# Altium PCB 主控.pcbdoc
Units mil, origin at the board's own origin, x right, y up, seen from the top; angles counter-clockwise.
Board outline 1526.77 x 1936.38 mil, 2 copper layers (Top Layer, Bottom Layer); 18 components, 30 nets, 117 pads, 45 vias.
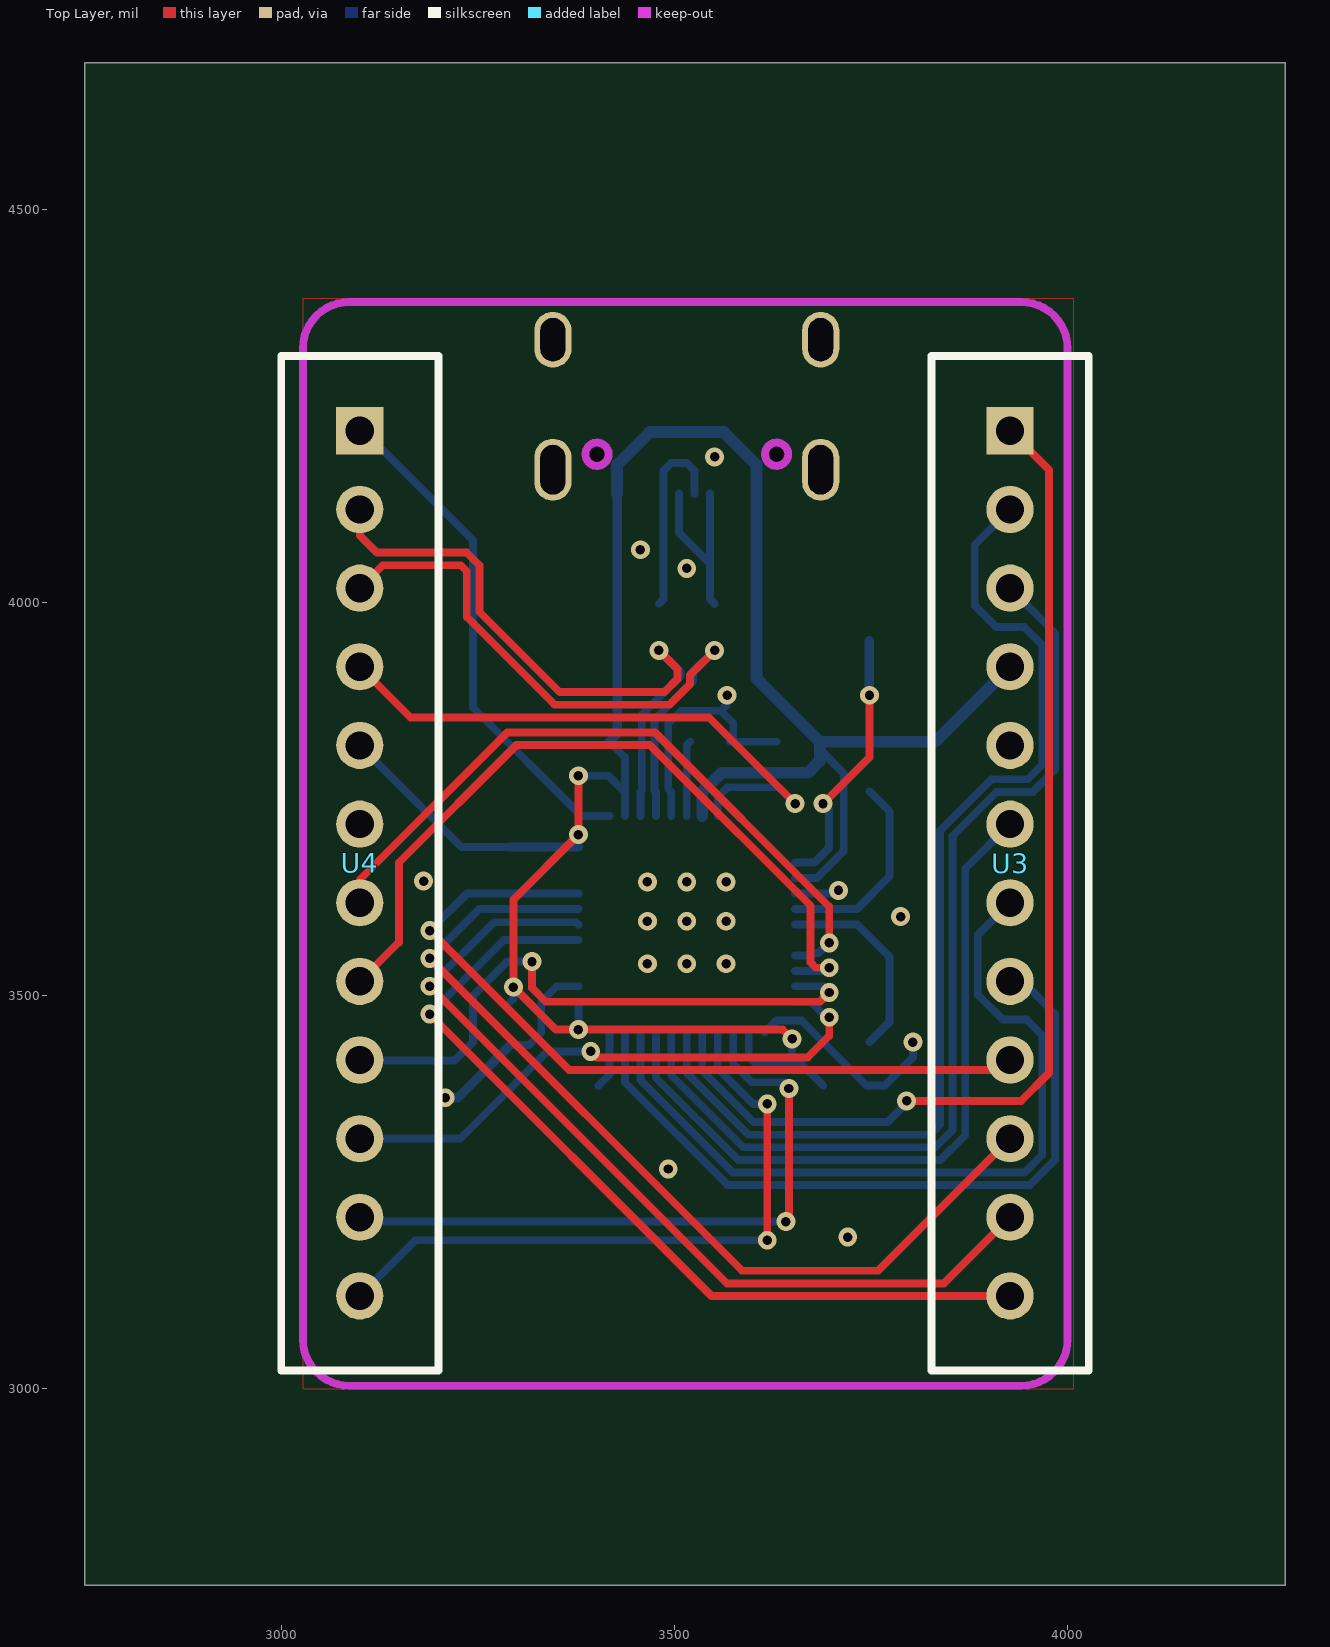
[diagram p0: Top Layer view]
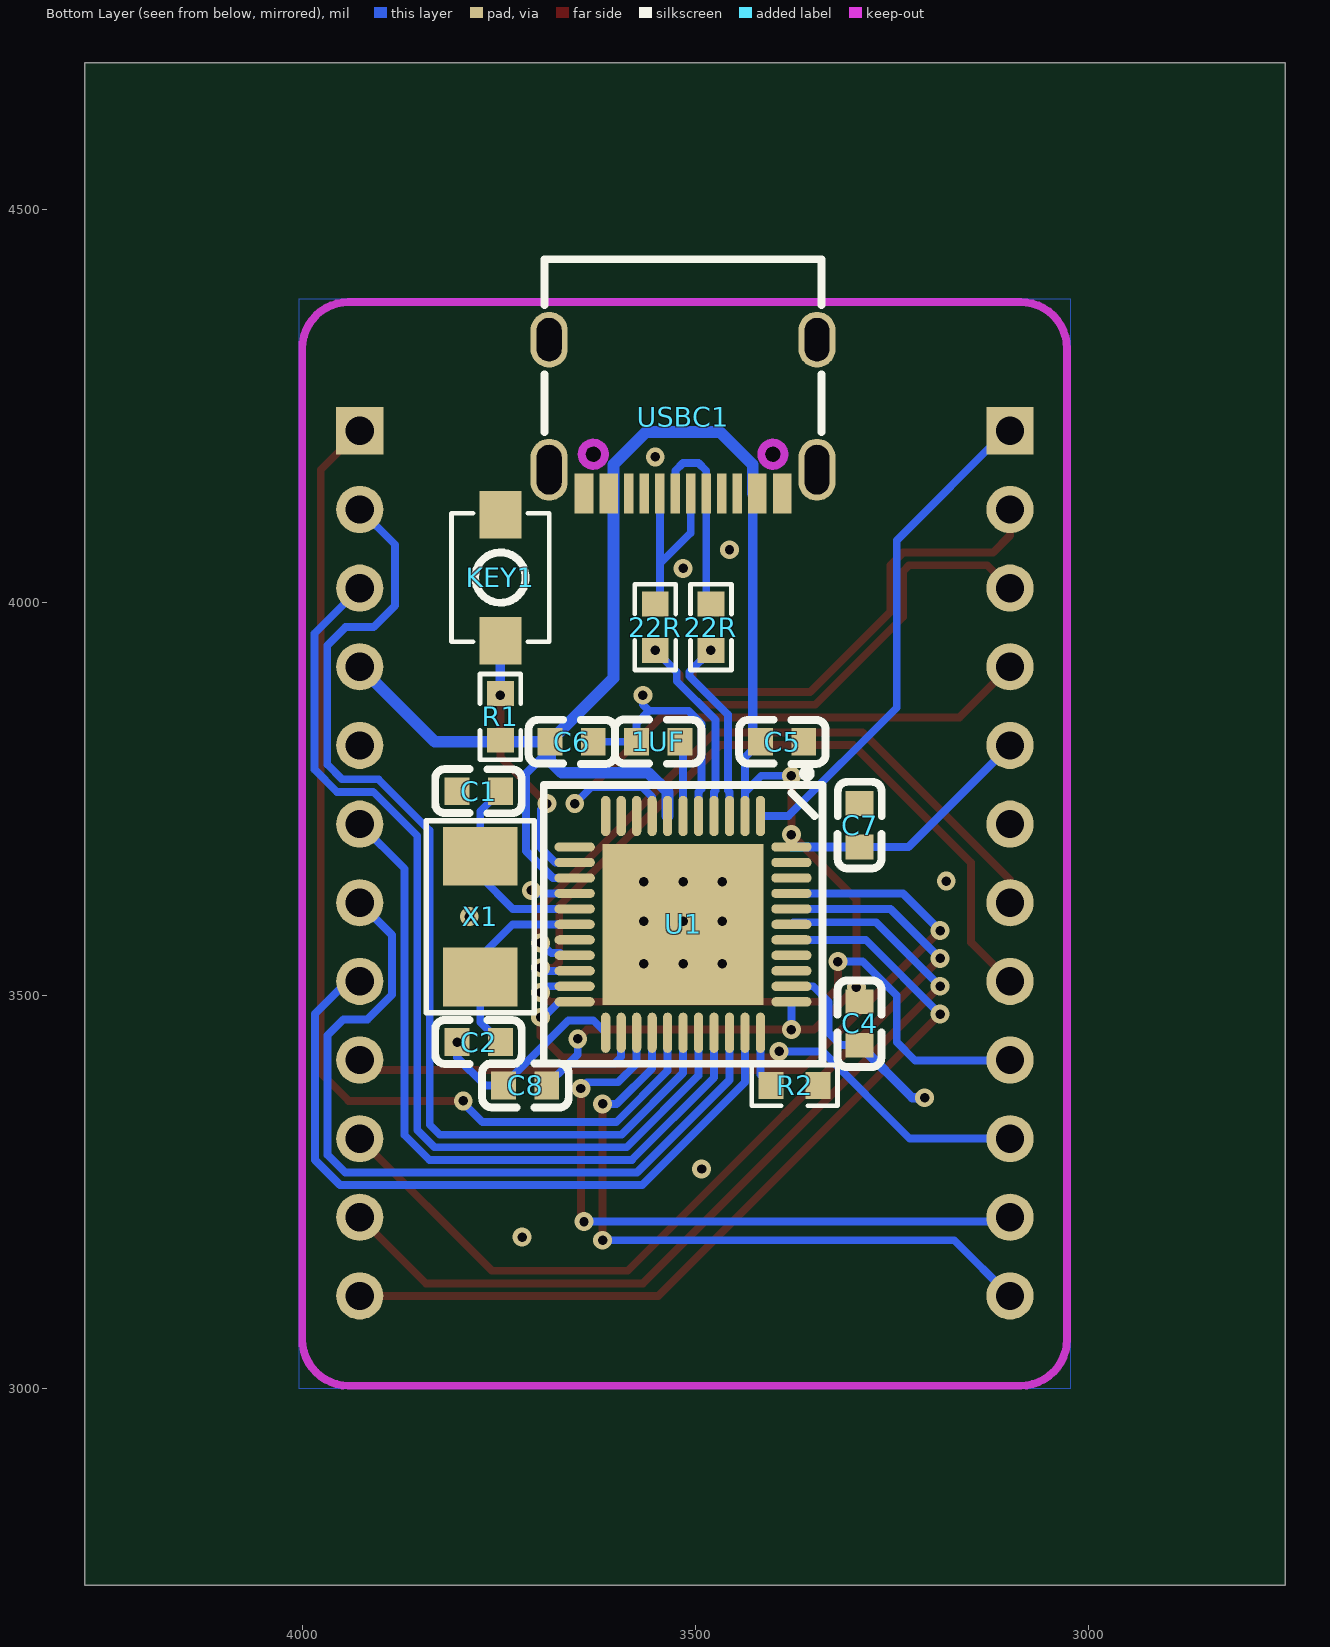
[diagram p1: Bottom Layer view, seen from below]

## Layer stack, top to bottom
Top Layer: signal copper (thickness not stored)
Dielectric: dielectric 12.6, FR-4, Dk 4.8
Bottom Layer: signal copper (thickness not stored)

## Board outline
4276.77,2750 2750,2750 2750,4686.38 4276.77,4686.38

## Components (designator, comment, footprint, x,y, rotation, side; value= is the part's Value field where it differs from the comment)
1UF "1uF" C0603 3547.24,3822.83 r180 bottom
22R "22Ω" R0603 3480.31,3968.5 r270 bottom
22R "22Ω" R0603 3551.18,3968.5 r90 bottom
C1 "22pF" C0603 3775.59,3759.84 r180 bottom
C2 "22pF" c0603 3775.59,3440.94 r180 bottom
C4 "100nF" C0603 3291.34,3464.57 r90 bottom
C5 "100nF" C0603 3389.76,3822.83 r0 bottom
C6 "100nF" C0603 3657.48,3822.83 r0 bottom
C7 "100nF" C0603 3291.34,3716.53 r270 bottom
C8 "470nF" C0603 3716.53,3385.83 r0 bottom
KEY1 "Switch3x4x2" SW-SMD_L4.0-W2.9-LS5.0 3748.03,4031.49 r90 bottom
R1 "10K" R0603 3748.03,3854.33 r90 bottom
R2 "10K" R0603 3374.01,3385.83 r180 bottom
U1 "ATMEGA32U4-MU" VQFN-44_L7.0-W7.0-P0.50-BL-EP5.2 3515.75,3590.55 r0 bottom
U3 "1X12排针" 1X12排针 3826.77,4118.11 r0 top
U4 "1X12排针" 1X12排针 3000,4118.11 r0 top
USBC1 "TYPE-C-31-M-12" USB-C_SMD-TYPE-C-31-M-12 3515.75,4236.22 r0 bottom
X1 "16MHZ" osc-smd_2p-l5.0-w3.2 3773.62,3600.39 r270 bottom

## Footprints (in the part's own frame and the unit in brackets; to place one, negate y for a bottom-side part, rotate by r counter-clockwise, add the part's x,y. Pads: shape width x height; smd on the part's side, far side on the other; paste and mask are expansions set on the pad)
1X12排针 [mil]
  rect 60x60 hole 36: 1(100,100.01)
  round 60 hole 36 copper offset -0.01,0.01: 2(100.02,-0.01) 3(100.02,-100.01) 4(100.02,-200.01) 5(100.02,-300.01) 6(100.02,-400.01) 7(100.02,-500.01) 8(100.02,-600.01) 9(100.02,-700.01) 10(100.02,-800.01) 11(100.02,-900.01) 12(100.02,-1000.01)
  silkscreen extent 0,-1095 200,195
C0603 [mm]
  rect 0.8x0.9 smd: 1(-0.7,0) 2(0.7,0)
  silkscreen extent -1.41,-0.71 1.39,0.72
c0603 [mm]
  rect 0.8x0.9 smd: 1(-0.7,0) 2(0.7,0)
  silkscreen extent -1.41,-0.71 1.39,0.72
osc-smd_2p-l5.0-w3.2 [mm]
  rect 1.9x2.4 smd: 1(-1.95,0) 2(1.95,0)
  silkscreen extent -3.1,-1.75 3.1,1.75
R0603 [mil]
  rect 31.75x34.02 smd: 1(-29.66,0) 2(29.65,0)
  silkscreen extent -55,-26 55,26
SW-SMD_L4.0-W2.9-LS5.0 [mm]
  rect 1.53x1.36 smd: 1(-2.035,0) 2(2.035,0)
  silkscreen extent -2.08,-1.58 2.08,1.58
USB-C_SMD-TYPE-C-31-M-12 [mm]
  oval 1.2x1.8 hole 0.8 slot 1.4 at 90 deg: 0(4.325,-2.484) 3(-4.325,-2.484)
  oval 1.2x2 hole 0.8 slot 1.6 at 90 deg: 1(4.325,1.716) 2(-4.325,1.716)
  rect 0.3x1.3 smd: A1(-3.35,2.484) A4(-2.55,2.484) A5(-1.25,2.484) A6(-0.25,2.484) A7(0.25,2.484) A8(1.25,2.484) A9(2.55,2.484) A12(3.35,2.484) B1(3.05,2.484) B4(2.25,2.484) B5(1.75,2.484) B6(0.75,2.484) B7(-0.75,2.484) B8(-1.75,2.484) B9(-2.25,2.484) B12(-3.05,2.484)
  Multi-Layer board cut-out: -2.525,1.216 -2.577,1.03 -2.714,0.894 -2.9,0.845 -3.086,0.894 -3.223,1.03 -3.275,1.216 -3.275,1.216 -3.223,1.401 -3.086,1.537 -2.9,1.586 -2.714,1.537 -2.577,1.401 -2.525,1.216
  Multi-Layer board cut-out: 3.275,1.216 3.223,1.03 3.086,0.894 2.9,0.845 2.714,0.894 2.577,1.03 2.525,1.216 2.525,1.216 2.577,1.401 2.714,1.537 2.9,1.586 3.086,1.537 3.223,1.401 3.275,1.216
  silkscreen extent -4.47,-5.08 4.47,0.5
VQFN-44_L7.0-W7.0-P0.50-BL-EP5.2 [mm]
  oval 0.3x1.3 smd: 1(-2.5,-3.5) 2(-2,-3.5) 3(-1.5,-3.5) 4(-1,-3.5) 5(-0.5,-3.5) 6(0,-3.5) 7(0.5,-3.5) 8(1,-3.5) 9(1.5,-3.5) 10(2,-3.5) 11(2.5,-3.5) 23(2.5,3.5) 24(2,3.5) 25(1.5,3.5) 26(1,3.5) 27(0.5,3.5) 28(0,3.5) 29(-0.5,3.5) 30(-1,3.5) 31(-1.5,3.5) 32(-2,3.5) 33(-2.5,3.5)
  oval 1.3x0.3 smd: 12(3.5,-2.5) 13(3.5,-2) 14(3.5,-1.5) 15(3.5,-1) 16(3.5,-0.5) 17(3.5,0) 18(3.5,0.5) 19(3.5,1) 20(3.5,1.5) 21(3.5,2) 22(3.5,2.5) 34(-3.5,2.5) 35(-3.5,2) 36(-3.5,1.5) 37(-3.5,1) 38(-3.5,0.5) 39(-3.5,0) 40(-3.5,-0.5) 41(-3.5,-1) 42(-3.5,-1.5) 43(-3.5,-2) 44(-3.5,-2.5)
  rect 5.2x5.2 smd: 45(0,0)
  silkscreen extent -4.5,-5 4.5,4.5

## Via types
v1: diameter 24, hole 12, Top Layer to Bottom Layer, 45 vias

## Nets (pads, with @x,y where several pads share a name; then routed paths per layer and width w, separated by ;. In a path a pad name is that pad's centre, name@x,y a point inside that pad or via, vN(x,y) a via of type N, cw(c..) or ccw(c..) an arc to the next point about the centre after c; other vN are vias at no path point)
CAPLED: U1.1 U4.1 | length 644.7
  Bottom Layer w10: U4.1 3104.72,4218.11 3244.09,4078.74 3244.09,3866.14 3381.9,3728.34 U1.1
COL0: U1.32 U3.8 | length 937.1
  Bottom Layer w10: U1.32 3437,3389.76 3567.66,3259.1 3952.01,3259.1 3983.78,3290.87 3983.78,3476.84 3942.53,3518.1 U3.8
COL1: U1.31 U3.7 | length 1018.5
  Bottom Layer w10: U1.31 3456.69,3392.7 3574.29,3275.1 3945.39,3275.1 3967.78,3297.5 3967.78,3449.54 3947.57,3469.75 3917.15,3469.75 3885.78,3501.12 3885.78,3577.1 U3.7
COL2: U1.30 U3.6 | length 926
  Bottom Layer w10: U1.30 3476.37,3395.65 3580.92,3291.1 3838.34,3291.1 3869.78,3322.54 3869.78,3661.1 U3.6
COL3: U1.29 U3.3 | length 1252.7
  Bottom Layer w10: U1.29 3496.06,3398.59 3587.54,3307.1 3831.72,3307.1 3853.78,3329.17 3853.78,3703.08 3909.8,3759.1 3955.95,3759.1 3984.25,3787.4 3984.25,3960.63 U3.3
COL4: U1.28 U3.2 | length 1349.5
  Bottom Layer w10: U1.28 3515.74,3401.53 3594.17,3323.1 3825.09,3323.1 3837.78,3335.79 3837.78,3709.71 3903.17,3775.1 3949.32,3775.1 3968.25,3794.03 3968.25,3945.13 3944.88,3968.5 3909.45,3968.5 3881.89,3996.06 3881.89,4073.21 U3.2
COL5: U1.27 U3.1 | length 1380.8
  Top Layer w10: v1(3795.27,3366.14) 3940.94,3366.14 3976.38,3401.57 3976.38,4168.51 U3.1
  Bottom Layer w10: U1.27 3535.43,3404.47 3600.8,3339.1 3770.91,3339.1 3795.27,3363.46 v1(3795.27,3366.14)
COL6: U1.26 U4.12 | length 847.7
  Top Layer w10: v1(3618.11,3188.98) v1(3618.11,3362.2)
  Bottom Layer w10: U4.12 3170.89,3188.98 v1(3618.11,3188.98) ; U1.26 3555.11,3407.42 3600.32,3362.2 v1(3618.11,3362.2)
COL7: U1.25 U4.11 | length 838.2
  Top Layer w10: v1(3641.73,3212.6) 3645.67,3216.53 v1(3645.67,3381.89)
  Bottom Layer w10: U4.11 3105.51,3212.6 v1(3641.73,3212.6) ; U1.25 3574.8,3413.39 3598.42,3389.76 3637.79,3389.76 v1(3645.67,3381.89)
COL8: U1.22 U4.10 | length 732.4
  Top Layer w10: v1(3393.7,3429.13) 3401.32,3421.51 3669.54,3421.51 3696.85,3448.82 v1(3696.85,3472.44)
  Bottom Layer w10: U4.10 3227.55,3318.1 3338.58,3429.13 v1(3393.7,3429.13) ; U1.22 3673.24,3492.12 3692.91,3472.44 v1(3696.85,3472.44)
COL9: U1.21 U4.9 | length 776.1
  Top Layer w10: v1(3318.9,3543.31) 3318.9,3509.82 3336.47,3492.25 3685.16,3492.25 v1(3696.85,3503.94)
  Bottom Layer w10: U4.9 3100.79,3417.32 3220.47,3417.32 3244.09,3440.94 3244.09,3500 3287.4,3543.31 v1(3318.9,3543.31) ; U1.21 3688.98,3511.81 v1(3696.85,3503.94)
COL10: U1.20 U4.8 | length 985.2
  Top Layer w10: U4.8 3149.61,3567.7 3149.61,3669.04 3299.21,3818.64 3468.5,3818.64 3492.12,3795.02 3492.34,3795.02 3673.23,3614.14 3673.23,3542.05 3679.85,3535.43 v1(3696.85,3535.43)
  Bottom Layer w10: U1.20 3692.9,3531.49 v1(3696.85,3535.43)
COL11: U1.19 U4.7 | length 891.4
  Top Layer w10: U4.7 3100.01,3647.26 3287.4,3834.64 3475.35,3834.64 3696.85,3613.14 v1(3696.85,3566.93)
  Bottom Layer w10: U1.19 3669.29,3551.18 3672.06,3553.95 3683.21,3553.95 3696.19,3566.93 v1(3696.85,3566.93)
D+: 22R.1@3551.18,3938.84 U1.4 U4.3 | length 849.2
  Top Layer w10: U4.3 3129.15,4047.24 3228.35,4047.24 3235.97,4039.62 3235.97,3981.56 3347.7,3869.82 3493.79,3869.82 3519.94,3895.97 3519.94,3907.6 v1(3551.18,3938.84)
  Bottom Layer w10: U1.4 3476.37,3758.93 3474.53,3760.77 3474.53,3850.57 3523.75,3899.79 3523.75,3911.41 v1(3551.18,3938.84)
D-: 22R.2@3480.32,3938.85 U1.3 U4.2 | length 850.1
  Top Layer w10: U4.2 3100.01,4085.03 3121.8,4063.24 3235.97,4063.24 3251.97,4047.24 3251.97,3988.19 3354.33,3885.82 3487.16,3885.82 3503.94,3902.6 3503.94,3915.23 v1(3480.32,3938.85)
  Bottom Layer w10: U1.3 3456.69,3758.93 3458.53,3760.77 3458.53,3857.2 3507.75,3906.41 3507.75,3911.42 v1(3480.32,3938.85)
GND: 1UF.1 C1.1 C2.1 C4.1 C5.1 C6.1 C7.1 C8.2 KEY1.2 R2.2 U1.5 U1.15 U1.23 U1.35 U1.43 U3.5 U4.6 USBC1.0 USBC1.1 USBC1.2 USBC1.3 USBC1.A1 USBC1.A12 USBC1.B1 USBC1.B12 | length 892.5
  Bottom Layer w10: C4.1 3314.95,3437 3330.71,3452.76 3330.71,3492.12 3350.39,3511.81 U1.35 ; U1.5 3496.06,3758.93 3492.12,3762.86 3492.12,3845.54 3508.79,3862.2 3559.05,3862.2 ; v1(3566.93,3881.89) 3566.93,3870.08 3559.05,3862.2 ; 1UF.1@3570.87,3822.83 1UF.1 ; U1.23 3629.93,3468.5 3661.42,3468.5 C8.2 3767.72,3385.83 3803.15,3421.26 C2.1 ; C6.1 1UF.1 ; U1.15 3704.72,3629.92 v1(3708.66,3633.86) ; 3559.05,3862.2 3574.81,3846.45 1UF.1
  Bottom Layer w12: v1(3208.66,3370.08) 3224.41,3370.08 C4.1
  other v1: 3720.47,3192.91 3492.12,3279.53 3803.15,3440.94 3787.62,3600.39 3181.1,3645.67 3515.75,4043.3 3456.69,4066.93 3551.18,4185.04
RESET: KEY1.1 R1.2 U1.13 | length 339.9
  Top Layer w10: v1(3688.97,3744.09) 3748.03,3803.15 v1(3748.03,3881.89)
  Bottom Layer w10: U1.13 3678.15,3669.29 3696.6,3687.73 3696.6,3736.47 v1(3688.97,3744.09)
  Bottom Layer w12: R1.2 KEY1.1
RGB: U1.8 U4.4 | length 762
  Top Layer w10: U4.4 3164.29,3853.82 3543.81,3853.82 v1(3653.54,3744.09)
  Bottom Layer w10: U1.8 3555.11,3752.44 3567.63,3764.96 3632.67,3764.96 v1(3653.54,3744.09)
ROW0: U1.41 U3.9 | length 1024.9
  Top Layer w10: v1(3188.98,3582.68) 3366.14,3405.51 3914.19,3405.51 U3.9
  Bottom Layer w10: v1(3188.98,3582.68) 3236.22,3629.92 U1.41
ROW1: U1.40 U3.10 | length 1187
  Top Layer w10: v1(3188.98,3547.24) 3586.12,3150.1 3758.78,3150.1 U3.10
  Bottom Layer w10: v1(3188.98,3547.24) 3251.96,3610.23 U1.40
ROW2: U1.39 U3.11 | length 1152.9
  Top Layer w10: v1(3188.98,3511.81) 3566.68,3134.1 3842.78,3134.1 U3.11
  Bottom Layer w10: v1(3188.98,3511.81) 3270.49,3593.32 3375.17,3593.32 U1.39
ROW3: U1.38 U3.12 | length 1114.3
  Top Layer w10: v1(3188.98,3476.38) 3547.25,3118.1 U3.12
  Bottom Layer w10: v1(3188.98,3476.38) 3283.45,3570.86 U1.38
U1_6: 1UF.2 U1.6 | length 96.1
  Bottom Layer w10: U1.6 3515.74,3818.88 1UF.2
U1_16: C1.2 U1.16 X1.1 | length 256.1
  Bottom Layer w10: U1.16 3732.27,3610.23 3773.62,3651.57 X1.1 3773.62,3734.25 C1.2
U1_17: C2.2 U1.17 X1.2 | length 256.1
  Bottom Layer w10: U1.17 3732.29,3590.55 3773.62,3549.21 X1.2 3773.62,3466.53 C2.2
U1_33: R2.1 U1.33 | length 72.6
  Bottom Layer w10: R2.1 3417.32,3399.47 U1.33
USBC1_B6: 22R.2@3551.18,3998.15 USBC1.A6 USBC1.B6 | length 248.4
  Bottom Layer w10: USBC1.A6 3505.91,4088.39 3545.28,4049.02 ; USBC1.B6 3545.28,4049.02 ; 22R.2@3551.18,3998.15 3545.28,4004.05 3545.28,4049.02
USBC1_B7: 22R.1@3480.32,3998.16 USBC1.A7 USBC1.B7 | length 248
  Bottom Layer w10: 22R.1@3480.32,3998.16 3486.22,4004.07 USBC1.B7 3486.22,4167.32 3496.06,4177.16 3515.75,4177.16 3525.59,4167.32 USBC1.A7
VCC: C4.2 C5.2 C6.2 C7.2 C8.1 R1.1 U1.2 U1.7 U1.14 U1.24 U1.34 U1.44 U3.4 U4.5 USBC1.A4 USBC1.A9 USBC1.B4 USBC1.B9 | length 3107.7
  Top Layer w10: v1(3377.95,3779.53) v1(3377.95,3704.72) 3295.28,3622.05 v1(3295.28,3510.82) 3349.4,3456.69 v1(3377.95,3456.69) 3637.79,3456.69 v1(3649.61,3444.88)
  Bottom Layer w10: U4.5 3229.14,3688.98 C7.2 ; C4.2 3295.28,3496.06 v1(3295.28,3510.82) ; v1(3377.95,3456.69) U1.34@3377.95,3492.11 ; U1.44@3377.95,3688.97 v1(3377.95,3704.72) ; v1(3377.95,3779.53) 3416.18,3779.53 3437,3758.7 ; C5.2 3437,3803.15 3437,3758.7 ; U1.2 3437,3758.7 ; U1.24 3594.48,3422.16 3603.25,3413.38 3661.42,3413.38 ; v1(3649.61,3444.88) 3649.61,3425.19 3661.42,3413.38 ; U1.14 3681.09,3649.6 3715.38,3683.88 3715.38,3782.48 C6.2@3685.04,3812.82 ; C8.1 3661.42,3413.38
  Bottom Layer w12: C7.2@3291.35,3688.97 U1.44 ; C5.2 3427.16,3832.68 USBC1.B9
  Bottom Layer w15: USBC1.B9 3427.16,4175.19 3468.5,4216.53 3562.99,4216.53 3604.33,4175.19 USBC1.B4 3604.33,3903.54 C6.2 ; U1.7 3535.43,3758.93 3559.97,3783.46 3670.04,3783.46 3685.04,3798.46 3685.04,3812.82 C6.2 ; U3.4 3831.51,3822.83 C6.2
"": U1.9 U1.10 U1.11 U1.12 U1.18 U1.36 U1.37 U1.42 U1.45 USBC1.A5 USBC1.A8 USBC1.B5 USBC1.B8
  other v1: 3465.74,3540.56 3515.74,3540.56 3565.74,3540.56 3465.75,3594.49 3515.75,3594.49 3565.75,3594.49 3465.75,3644.49 3515.75,3644.49 3565.75,3644.49

## Polygon pours and split planes (outlines as drawn)
GND on Bottom Layer (solid, remove dead copper, pour order 2): 3023.62,3000 4003.93,3000 4003.93,4385.82 3023.62,4385.82
GND on Top Layer (solid, remove dead copper, pour order 2): 3027.56,3000 4007.87,3000 4007.87,4385.82 3027.56,4385.82

## Keep-outs
Board Outline Layer:
  lines w10 net "": 3086.61,4381.89 ccw(c3086.61,4322.83) 3027.56,4322.83 3027.56,3062.99 ccw(c3086.61,3062.99) 3086.61,3003.94 3940.94,3003.94 ccw(c3940.94,3062.99) 4000,3062.99 ; 3086.61,4381.89 3086.61,4381.89 ; 3086.61,4381.89 3940.9,4381.85 3940.94,4381.89 cw(c3940.94,4322.83) 4000,4322.83 ; 3999.98,3062.99 4000,4322.83 ; 3999.98,3062.99 4000,3062.99 ; 4000,4322.83 4000,4322.83
Multi-Layer:
  circle w10: c3401.57,4188.36 r14.76
  circle w10: c3629.91,4188.36 r14.76